# Altium PCB Sensorunit.PcbDoc
Units mil, origin at the board's own origin, x right, y up, seen from the top; angles counter-clockwise.
Board outline 2558.19 x 2342.03 mil, 2 copper layers (Top Layer, Bottom Layer); 24 components, 16 nets, 103 pads, 16 vias.
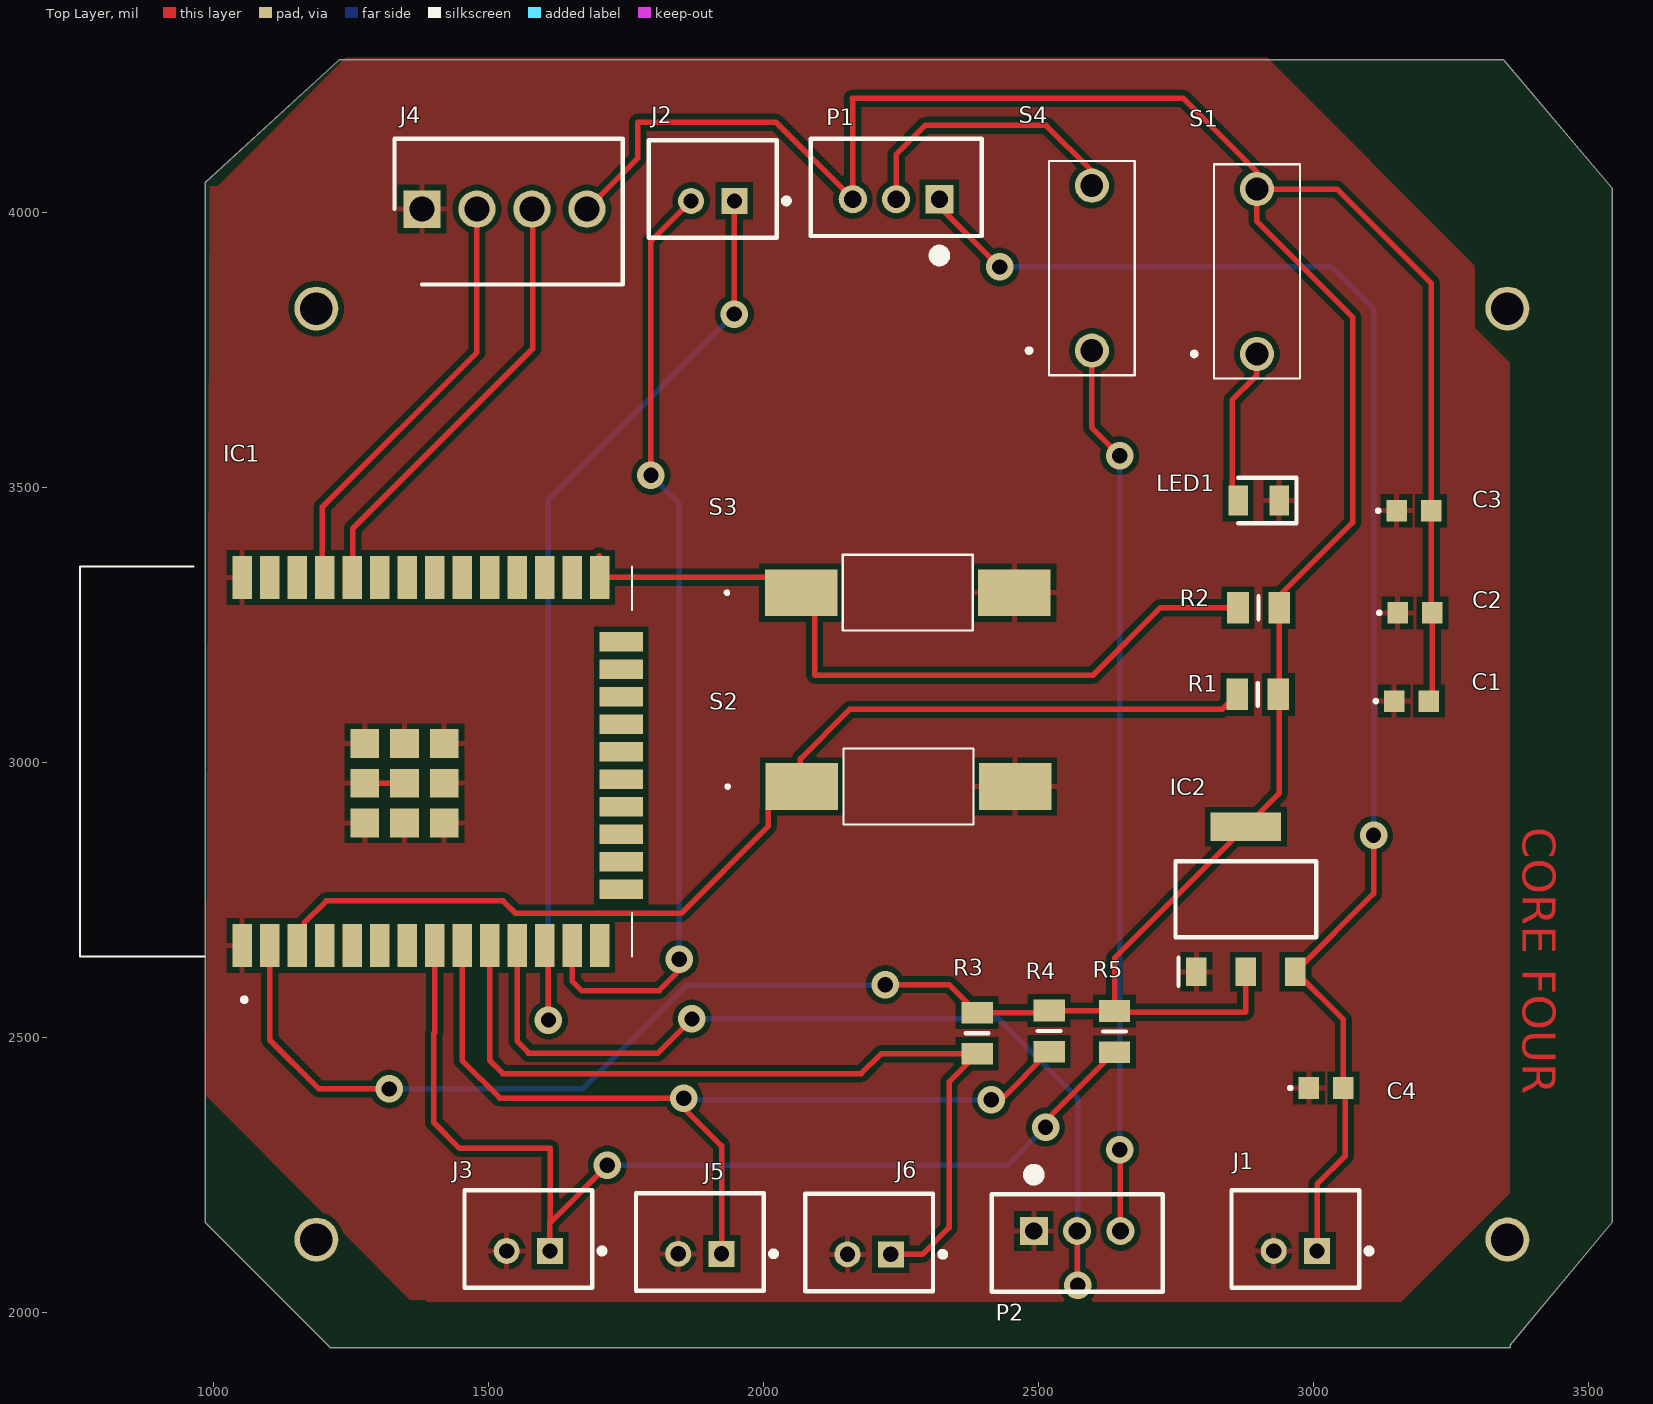
[diagram p0: Top Layer view]
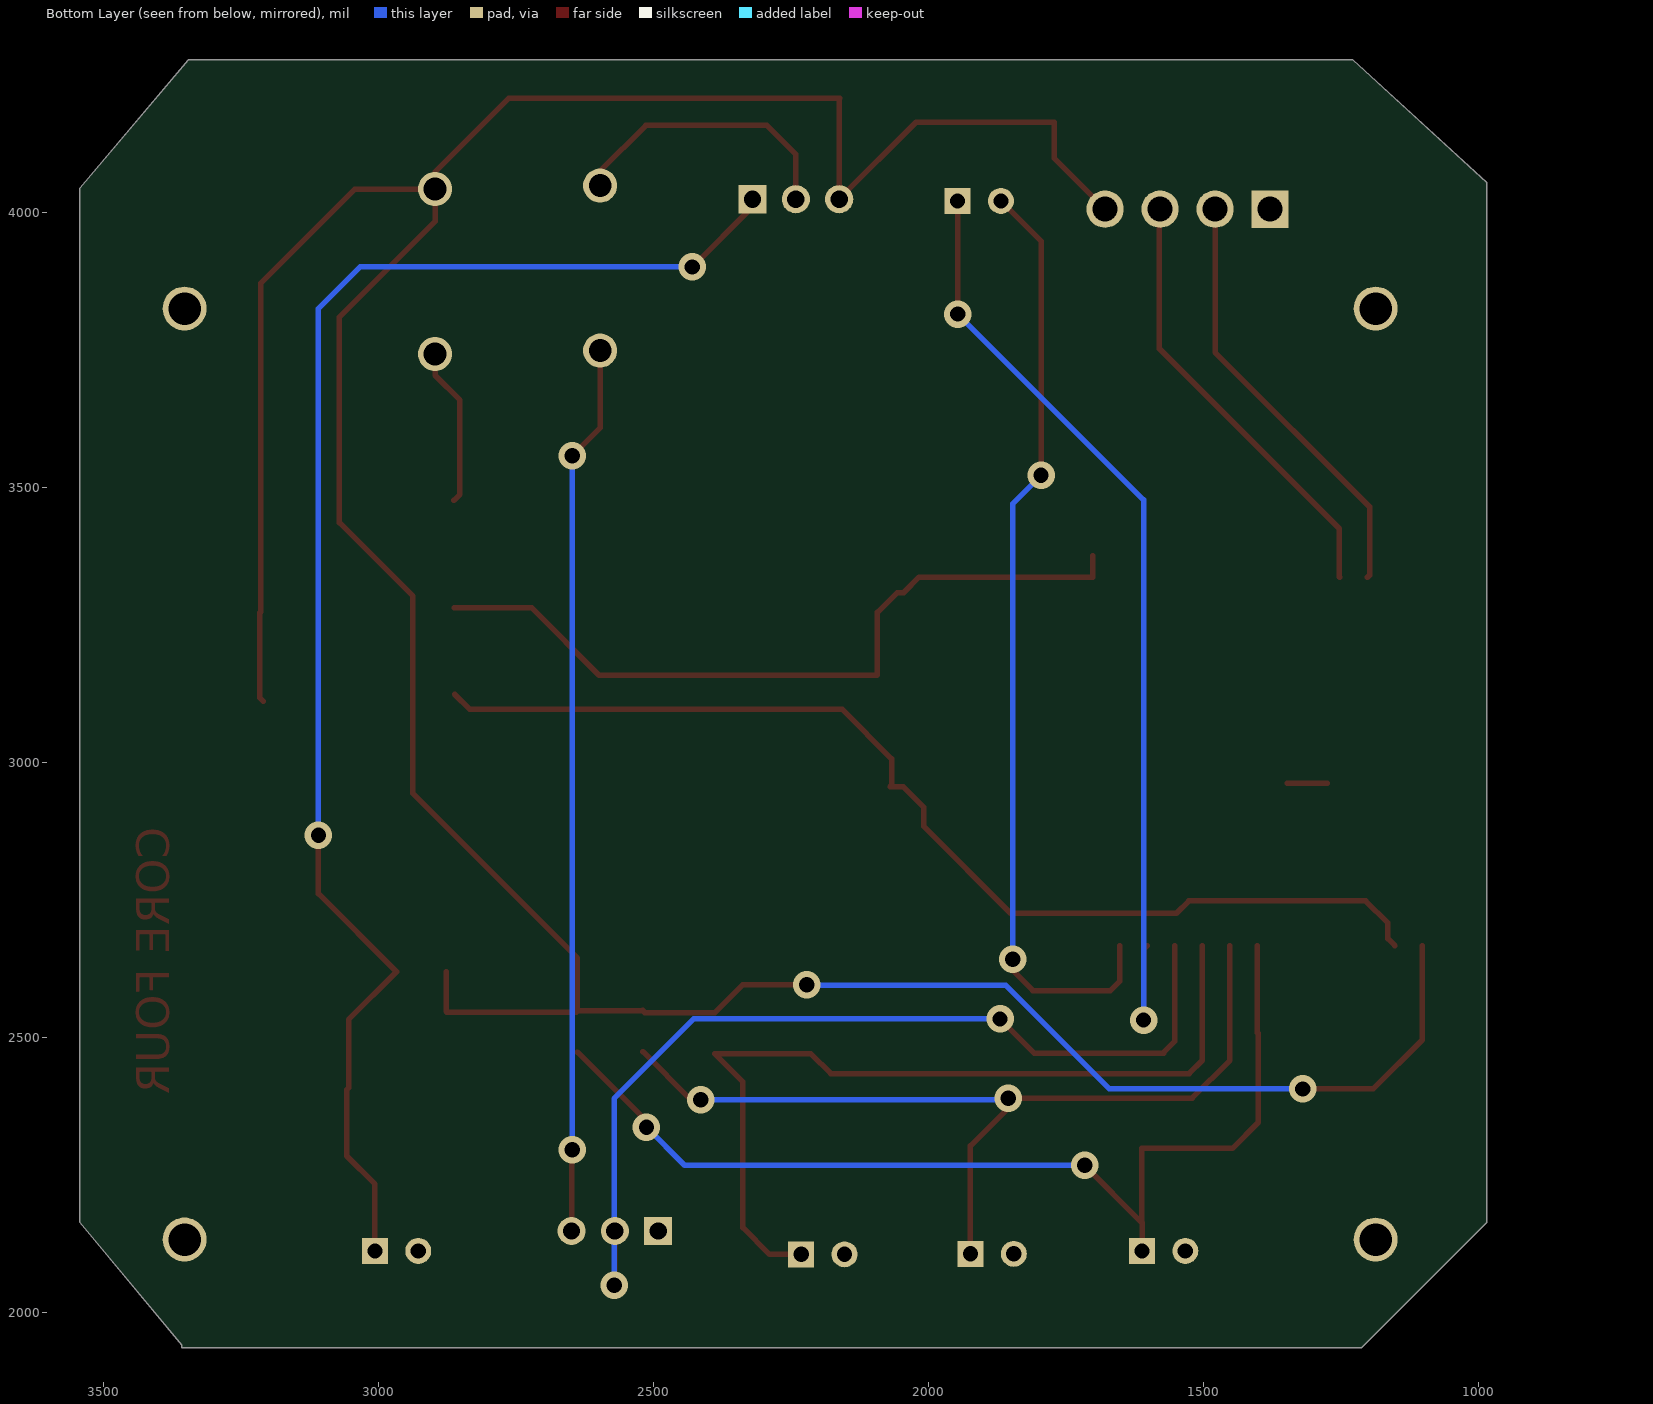
[diagram p1: Bottom Layer view, seen from below]
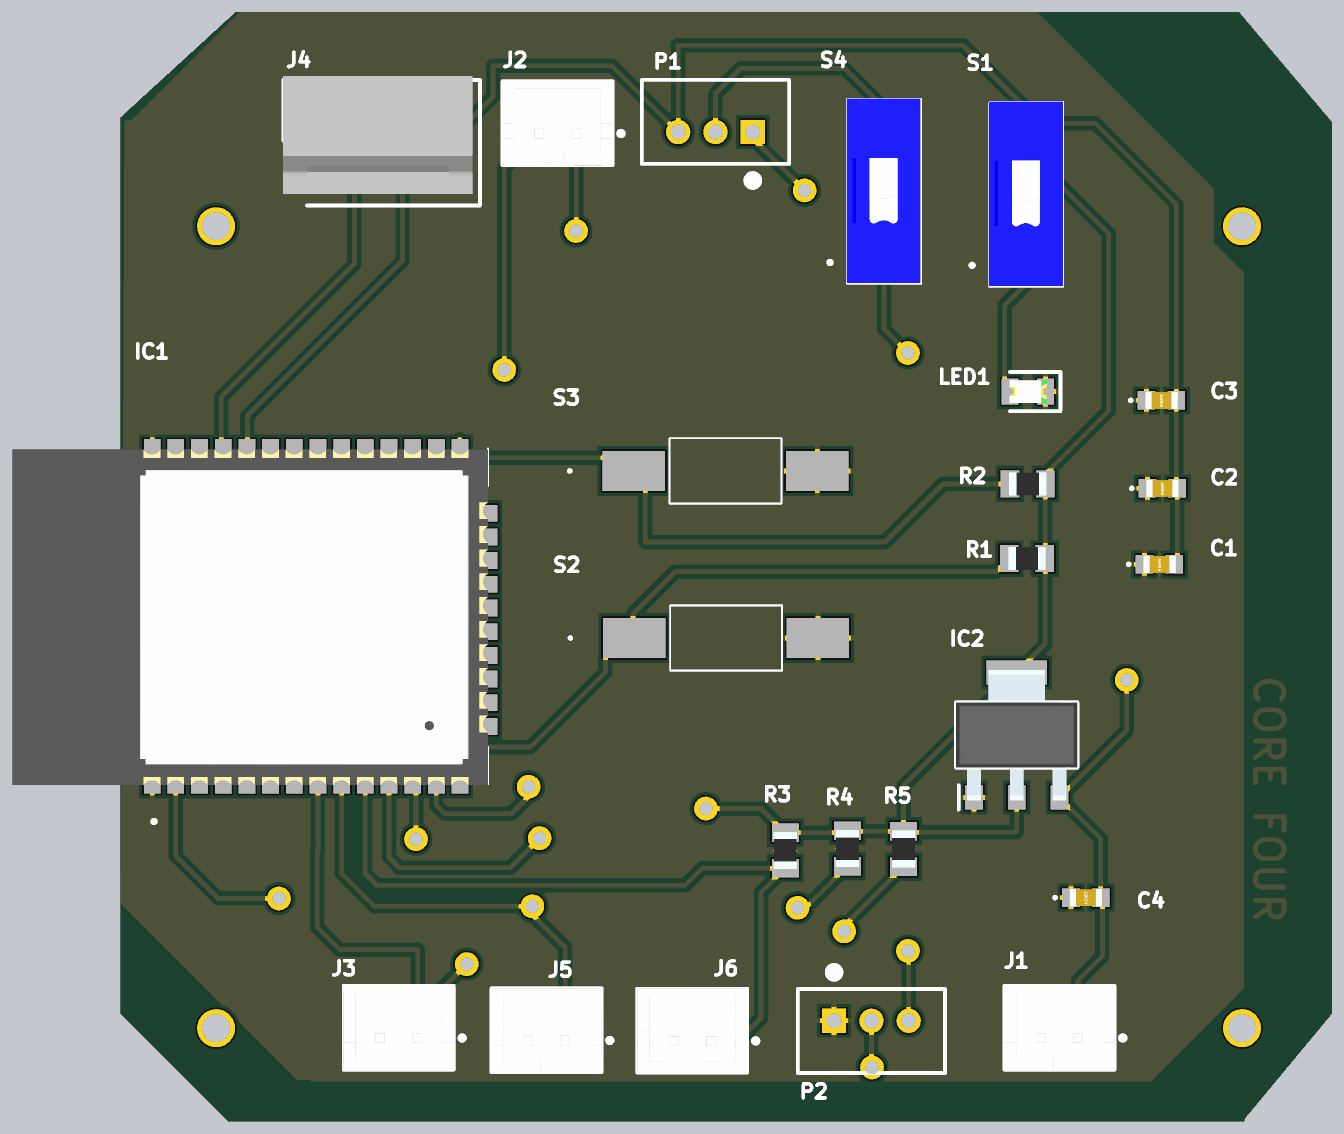
[diagram p2: 3D render of the assembled board from above, using the file's embedded part models]

## Layer stack, top to bottom
Top Solder: solder mask 0.4, Solder Resist, Dk 3.5
Top Layer: signal copper 1.4
Dielectric 1: dielectric 12.6, FR-4, Dk 4.8
Bottom Layer: signal copper 1.4
Bottom Solder: solder mask 0.4, Solder Resist, Dk 3.5

## Board outline
1228.86,4277.44 985.33,4054.64 985.33,4033.91 985.33,2163.39 1213.31,1935.41 3358.45,1935.41 3358.45,1940.59 3543.52,2163.39 3543.52,4044.27 3346.62,4277.44

## Design rules (kind name [scope] priority, off if disabled: settings)
Clearance [All] p1: gap=10 ignorepadtopadclearanceinfootprint=FALSE except(0: Arc-Hole Track-Hole SMDPad-Hole THPad-Hole Via-Hole Fill-Hole Poly-Hole Region-Hole Text-Hole)
PolygonConnect [All] p1: connectstyle=Relief reliefconductorwidth=10 reliefentries=4 polygonreliefangle="90 Angle" airgapwidth=10
RoutingVias [All] p1: holewidth=28 width=50 viastyle="Through Hole" minholewidth=28 minwidth=50 maxholewidth=28 maxwidth=50
SolderMaskExpansion [All] p1: expansion=4 istentingtop=FALSE
Width [All] p1: maxlimit=10 minlimit=10 preferedwidth=10
30 further rules are at their usual default settings.

## Components (designator, comment, footprint, x,y, rotation, side; value= is the part's Value field where it differs from the comment)
C1 "C0603C104K4RALTU" C0603 3179.01,3111.51 r0 top
C2 "C0603C104K4RALTU" C0603 3185.19,3271.96 r0 top
C3 "C0603C104K4RALTU" C0603 3183.19,3457.68 r0 top
C4 "C0603C104K4RALTU" C0603 3023.6,2407.91 r0 top
IC1 "ESP32-WROOM-32D_M113DH3200PS3Q0_" ESP32WROOM32DM113DH3200PS3Q0 1052.48,2666.97 r90 top
IC2 "ams1117-3.3v" SOT229P700X180-4N 2877.7,2751.18 r90 top
J1 "B2B-PH-K(LF)(SN)" FP-B2B-PH-K_LF_SN-MFG 2967.75,2133.23 r0 top
J2 "B2B-PH-K(LF)(SN)" FP-B2B-PH-K_LF_SN-MFG 1908.27,4042.66 r0 top
J3 "B2B-PH-K(LF)(SN)" FP-B2B-PH-K_LF_SN-MFG 1572.92,2133.23 r0 top
J4 "3-647050-4" SHDR4W66P0X254_1X4_1016X635X1079P 1379.46,4006.17 r0 top
J5 "B2B-PH-K(LF)(SN)" FP-B2B-PH-K_LF_SN-MFG 1884.82,2128.05 r0 top
J6 "B2B-PH-K(LF)(SN)" FP-B2B-PH-K_LF_SN-MFG 2192.61,2127.12 r0 top
LED1 "150080BS75000" LEDC2012X80N 2900.98,3476.25 r180 top
P1 "B3B-PH-K-S(LF)(SN)" JST-B3B-PH-K-S-3_V 2241.69,4045.77 r180 top
P2 "B3B-PH-K-S(LF)(SN)" JST-B3B-PH-K-S-3_V 2570.86,2126.19 r0 top
R1 "CPF0805B100RE1" RESC2012X65N 2899.39,3123.8 r0 top
R2 "CPF0805B100RE1" RESC2012X65N 2900.72,3281.25 r0 top
R3 "CPF0805B100RE1" RESC2012X65N 2389.1,2507.56 r90 top
R4 "CPF0805B100RE1" RESC2012X65N 2520.05,2511.46 r90 top
R5 "CPF0805B100RE1" RESC2012X65N 2638.83,2510.6 r90 top
S1 "DS01-254-S-01BE" DS01254S01BE 2897.88,3742.68 r0 top
S2 "TL3302AF180QG" TL3302AF180QG 2264.19,2956.07 r0 top
S3 "TL3302AF180QG" TL3302AF180QG 2262.87,3308.69 r0 top
S4 "DS01-254-S-01BE" DS01254S01BE 2597.64,3748.87 r0 top

## Footprints (in the part's own frame and the unit in brackets; to place one, negate y for a bottom-side part, rotate by r counter-clockwise, add the part's x,y. Pads: shape width x height; smd on the part's side, far side on the other; paste and mask are expansions set on the pad)
C0603 [mm]
  rect 0.95x1 smd: 1(-0.8,0) 2(0.8,0)
  silkscreen extent -1.7,-0.05 -1.6,0.05, body extent -0.87,-0.48 0.88,0.47, height 0.87
DS01254S01BE [mm]
  round 1.575 hole 1.05: 1(0,0) 2(0,7.62)
  silkscreen extent -3,-1.14 1.98,8.76, body extent -2,-1.1 1.95,8.8, height 6.53
ESP32WROOM32DM113DH3200PS3Q0 [mm]
  rect 2x0.9 smd: 1(0,0) 2(0,-1.27) 3(0,-2.54) 4(0,-3.81) 5(0,-5.08) 6(0,-6.35) 7(0,-7.62) 8(0,-8.89) 9(0,-10.16) 10(0,-11.43) 11(0,-12.7) 12(0,-13.97) 13(0,-15.24) 14(0,-16.51) 25(17,-16.51) 26(17,-15.24) 27(17,-13.97) 28(17,-12.7) 29(17,-11.43) 30(17,-10.16) 31(17,-8.89) 32(17,-7.62) 33(17,-6.35) 34(17,-5.08) 35(17,-3.81) 36(17,-2.54) 37(17,-1.27) 38(17,0)
  rect 0.9x2 smd: 15(2.6,-17.51) 16(3.87,-17.51) 17(5.14,-17.51) 18(6.41,-17.51) 19(7.68,-17.51) 20(8.95,-17.51) 21(10.22,-17.51) 22(11.49,-17.51) 23(12.76,-17.51) 24(14.03,-17.51)
  rect 1.33x1.33 smd: 39(5.665,-5.665) 40(7.5,-5.665) 41(9.335,-5.665) 42(5.665,-7.5) 43(7.5,-7.5) 44(9.335,-7.5) 45(5.665,-9.335) 46(7.5,-9.335) 47(9.335,-9.335)
  silkscreen extent -2.6,-18.01 17.5,7.49, body extent -0.55,-18 17.45,7.5, height 3.1
FP-B2B-PH-K_LF_SN-MFG [mm]
  rect 1.2x1.2 hole 0.7 paste-1000 mask+0: 1(1,-0.55)
  round 1.2 hole 0.7 paste-1000 mask+0: 2(-1,-0.55)
  silkscreen extent -2.95,-2.25 3.53,2.25, body extent -3.05,-2.35 3.05,2.35, height 0.25
JST-B3B-PH-K-S-3_V [mm] "Connector, 3-Leads, Body 7.9x4.5mm, Pitch 2mm"
  rect 1.3x1.3 hole 0.8: 1(-2,0.55)
  round 1.3 hole 0.8: 2(0,0.55) 3(2,0.55)
  silkscreen extent -3.95,-2.25 3.95,3.4, body extent -3.95,-2.25 3.95,2.25, height 6
LEDC2012X80N [mm]
  rect 0.9x1.4 smd: 1(-0.95,0) 2(0.95,0)
  silkscreen extent -1.75,-1.05 0.95,1.05, body extent -1.03,-0.63 0.97,0.63, height 0.7
RESC2012X65N [mm]
  rect 1x1.45 smd: 1(-0.95,0) 2(0.95,0)
  silkscreen extent 0,-0.53 0,0.53, body extent -1,-0.63 1,0.63, height 0.65
SHDR4W66P0X254_1X4_1016X635X1079P [mm]
  rect 1.725x1.725 hole 1.15: 1(0,0)
  round 1.725 hole 1.15: 2(2.54,0) 3(5.08,0) 4(7.62,0)
  silkscreen extent -1.27,-3.48 9.27,3.25, body extent -1.28,-2.88 8.88,3.47, height 10.52
SOT229P700X180-4N [mm]
  rect 1.3x0.95 smd: 1(-3.35,2.29) 2(-3.35,0) 3(-3.35,-2.29)
  rect 1.3x3.25 smd: 4(3.35,0)
  silkscreen extent -4,-3.25 1.75,3.25, body extent -3.5,-3.25 3.5,3.25, height 1.8
TL3302AF180QG [mm]
  rect 3.35x2.16 smd: 1(-4.925,0) 2(4.925,0)
  silkscreen extent -8.4,-1.75 3,1.75

## Part data
C1 C2 C3 C4: "Capacitor", Manufacturer_Name=KEMET, Mouser Part Number=80-C0603C104K4RAL, Arrow Part Number=C0603C104K4RALTU, Arrow Price/Stock=https://www.arrow.com/en/products/c0603c104k4raltu/kemet-corporation, Datasheet Link=https://content.kemet.com/datasheets/KEM_C1018_X7R_SnPb_SMD.pdf, Height=0.87mm, Manufacturer_Part_Number=C0603C104K4RALTU, Mouser Price/Stock=https://www.mouser.co.uk/ProductDetail/KEMET/C0603C104K4RALTU?qs=Av9gTi0A7zOg0Qy3fuNTKg%3D%3D
IC1: "Integrated Circuit", Manufacturer_Name="Espressif Systems", Manufacturer_Part_Number=ESP32-WROOM-32D(M113DH3200PS3Q0), Mouser Part Number=356-ESPWROOM3200PS3, Datasheet Link=https://componentsearchengine.com/Datasheets/1/ESP32-WROOM-32D(M113DH3200PS3Q0).pdf, Height=3.2mm, Mouser Price/Stock=https://www.mouser.co.uk/ProductDetail/Espressif-Systems/ESP32-WROOM-32DM113DH3200PS3Q0?qs=wnTfsH77Xs7iNQbBNob0RQ%3D%3D
IC2: "Integrated Circuit", Manufacturer_Name="Advanced Monolithic Systems", Datasheet Link=http://www.advanced-monolithic.com/pdf/ds1117.pdf, Height=1.8mm, Manufacturer_Part_Number=ams1117-3.3v
J1 J2 J3 J5 J6: library part CMP-17439-000674-1, "Connector Header Through Hole 2 position 0.079\" (2.00mm)", Color=Beige, Current Rating=2A, Insulation Resistance=1GR, Max Operating Temperature=85°C, Min Operating Temperature=-25°C, Voltage Rating=100V, Contact Material=Brass, Contact Plating=Tin, Gender=Male, Lead Free="Lead Free", Material=Polyamide, Mount="Through Hole", Number of Positions=2, Number of Rows=1, Pitch=2mm, Termination=Crimp
J4: "Connector", Manufacturer_Name="TE Connectivity", Mouser Part Number=571-3-647050-4, Arrow Part Number=3-647050-4, Arrow Price/Stock=https://www.arrow.com/en/products/3-647050-4/te-connectivity?region=nac, Datasheet Link=https://www.te.com/commerce/DocumentDelivery/DDEController?Action=showdoc&DocId=Customer+Drawing%7F647050%7FU%7Fpdf%7FEnglish%7FENG_CD_647050_U.pdf%7F3-647050-4, Height=10.79mm, Manufacturer_Part_Number=3-647050-4, Mouser Price/Stock=https://www.mouser.co.uk/ProductDetail/TE-Connectivity-AMP/3-647050-4?qs=W5ux9j661SoBsMK9vpa9%252BQ%3D%3D
LED1: "LED", Manufacturer_Name="Wurth Elektronik", Mouser Part Number=710-150080BS75000, Datasheet Link=https://katalog.we-online.com/led/datasheet/150080BS75000.pdf, Height=0.8mm, Manufacturer_Part_Number=150080BS75000, Mouser Price/Stock=https://www.mouser.co.uk/ProductDetail/Wurth-Elektronik/150080BS75000?qs=2kOmHSv6VfT2tBo3UPVqAQ%3D%3D
P1 P2: library part CMP-2000-05164-1, "Male Header, Pitch 2 mm, 1 x 3 Position, Height 6 mm, Tail Length 3.4 mm, -25 to 85 degC, RoHS, Bulk", Manufacturer=JST, Datasheet URL=https://datasheet.ciiva.com/11746/0900766b80826550-11746939.pdf, Datasheet Version=Oct-06, Manufacturer URL=http://www.jst.com/home2.html, No of Positions=3, Pitch=2mm, Style/Orientation=StraightHeader/Plug, Termination=Crimp, Type=ShroudedHeader
R1 R2 R3 R4 R5: "Resistor", Manufacturer_Name="TE Connectivity", Mouser Part Number=279-CPF0805B100RE1, Arrow Part Number=CPF0805B100RE1, Arrow Price/Stock=https://www.arrow.com/en/products/cpf0805b100re1/te-connectivity?region=nac, Datasheet Link=http://docs-europe.electrocomponents.com/webdocs/13d1/0900766b813d116f.pdf, Height=0.65mm, Manufacturer_Part_Number=CPF0805B100RE1, Mouser Price/Stock=https://www.mouser.co.uk/ProductDetail/TE-Connectivity-Holsworthy/CPF0805B100RE1?qs=9ylKvqdyudkCWLPT1QvLZQ%3D%3D
S1 S4: "Switch", Manufacturer_Name="CUI Devices", Mouser Part Number=490-DS01-254-S-01BE, Arrow Part Number=DS01-254-S-01BE, Arrow Price/Stock=https://www.arrow.com/en/products/ds01-254-s-01be/cui-devices?region=nac, Datasheet Link=https://www.mouser.in/datasheet/2/670/ds01_254-1777712.pdf, Height=7mm, Manufacturer_Part_Number=DS01-254-S-01BE, Mouser Price/Stock=https://www.mouser.co.uk/ProductDetail/CUI-Devices/DS01-254-S-01BE?qs=wnTfsH77Xs7pnks1JfJqEQ%3D%3D
S2 S3: "Switch", Manufacturer_Name=E-Switch, Mouser Part Number=612-TL3302A, Datasheet Link=https://componentsearchengine.com/Datasheets/2/TL3302AF180QG.pdf, Height=5mm, Manufacturer_Part_Number=TL3302AF180QG, Mouser Price/Stock=https://www.mouser.co.uk/ProductDetail/E-Switch/TL3302AF180QG?qs=HKd%2Fp3M7KlXmC8e3lU%2FDFQ%3D%3D

## Free pads (board coordinates)
  round 80 hole 59.06: 5(3353.27,3825.21) 7(1187.4,3825.21) 8(1187.4,2132.3) 9(3353.27,2132.3)

## Via types
v1: diameter 50, hole 28, Top Layer to Bottom Layer, 16 vias

## Nets (pads, with @x,y where several pads share a name; then routed paths per layer and width w, separated by ;. In a path a pad name is that pad's centre, name@x,y a point inside that pad or via, vN(x,y) a via of type N, cw(c..) or ccw(c..) an arc to the next point about the centre after c; other vN are vias at no path point)
3V3: C1.2 C2.2 C3.2 IC1.2 IC2.2 IC2.4 J4.4 P1.3 R1.2 R2.2 R3.2 R4.2 R5.2 S1.2 | length 6708.4
  Top Layer w10: IC1.2 1102.48,2495.66 1192.04,2406.09 v1(1320.14,2406.09) ; J4.4 1772.07,4098.77 1772.07,4164.25 2022.82,4164.25 P1.3 2162.95,4206.27 2161.58,4207.63 2764.1,4207.63 2897.88,4073.86 S1.2 ; v1(2221.65,2595.97) 2338.09,2595.97 R3.2 2516.15,2544.96 R4.2 2520.91,2548 R5.2 ; IC2.2 2877.7,2547.02 2876.58,2545.9 2640.93,2545.9 R5.2 ; C1.2 3216.69,3117.69 C2.2 3214.68,3273.97 C3.2 3214.68,3871.45 3043.45,4042.68 S1.2 ; R5.2 2638.83,2644.2 IC2.4 2938.12,2943.49 R2.2 2938.12,3302.24 3071.78,3435.9 3071.78,3809.7 2897.88,3983.6 S1.2
  Bottom Layer w10: v1(1320.14,2406.09) 1671.47,2406.09 1859.85,2594.47 2220.15,2594.47 v1(2221.65,2595.97)
14: IC1.13 J2.2 | length 1732.5
  Top Layer w10: IC1.13 1652.48,2602.46 1670,2584.94 1810.54,2584.94 1847.14,2621.54 v1(1847.14,2642.04) ; v1(1795.9,3521.89) 1795.9,3948.02 J2.2
  Bottom Layer w10: v1(1795.9,3521.89) 1847.14,3470.65 v1(1847.14,2642.04)
25: IC1.10 J6.1 R3.1 | length 1583.7
  Top Layer w10: IC1.10 1502.48,2458.36 1526.8,2434.04 2178.09,2434.04 2214.21,2470.16 R3.1 2337.91,2418.97 2337.91,2153.94 2289.44,2105.47 J6.1
26: IC1.11 P2.2 | length 1733.9
  Top Layer w10: IC1.11 1552.48,2493.2 1573.08,2472.61 1573.08,2470.89 1807.88,2470.89 v1(1870.44,2533.45) ; v1(2572.3,2049.26) 2570.86,2050.7 P2.2 P2.2@2574.87,2143.84
  Bottom Layer w10: v1(1870.44,2533.45) 2427.47,2533.45 2572.3,2388.62 v1(2572.3,2049.26)
27: IC1.12 J2.1 | length 1768
  Top Layer w10: IC1.12 1609.55,2659.9 v1(1609.55,2531.48) ; v1(1947.41,3815.36) 1947.64,3815.58 J2.1
  Bottom Layer w10: v1(1609.55,2531.48) 1609.55,3477.49 v1(1947.41,3815.36)
32: IC1.8 J3.1 R5.1 | length 1901.3
  Top Layer w10: IC1.8 1402.48,2508.6 1400.91,2507.03 1400.91,2345.25 1447.97,2298.19 1612.89,2298.19 1612.89,2163.66 ; J3.1 1612.29,2163.06 1612.89,2163.66 ; v1(1716.68,2267.46) 1612.89,2163.66 ; v1(2513.39,2336.74) 2513.39,2347.76 R5.1
  Bottom Layer w10: v1(1716.68,2267.46) 2444.11,2267.46 v1(2513.39,2336.74)
33: IC1.9 J5.1 R4.1 | length 1654.2
  Top Layer w10: IC1.9 1452.48,2458.24 1521.12,2389.59 v1(1855.17,2389.59) 1855.17,2371.75 1924.3,2302.62 1924.3,2106.5 J5.1 ; v1(2415.01,2386.44) 2432.44,2386.44 R4.1
  Bottom Layer w10: v1(1855.17,2389.59) 1858.33,2386.44 v1(2415.01,2386.44)
EN: IC1.3 R1.1 S2.1 | length 1987.8
  Top Layer w10: IC1.3 1165.2,2679.69 1165.2,2707.99 1205.51,2748.3 1527.15,2748.3 1549.8,2725.65 1851,2725.65 2009.35,2884 2009.35,2918.55 2046.87,2956.07 S2.1 2067.51,2958.85 2067.51,3006.48 2157.22,3096.19 2834.38,3096.19 R1.1
GND: C1.1 C2.1 C3.1 C4.1 IC1.1 IC1.38 IC1.39 IC1.40 IC1.41 IC1.42 IC1.43 IC1.44 IC1.45 IC1.46 IC1.47 IC2.1 J1.2 J3.2 J4.1 J5.2 J6.2 LED1.1 P2.1 S2.2 S3.2 | length 72.2
  Top Layer w10: IC1.40 IC1.43
GPIO0: IC1.25 R2.1 S3.1 | length 1392.3
  Top Layer w10: 1701.56,3375.85 1701.56,3337.18 IC1.25 ; IC1.25@1702.02,3336.72 2017.52,3336.72 2045.55,3308.69 2057.26,3308.69 2093.33,3272.63 2093.33,3159.4 2094.25,3158.48 2599.36,3158.48 2722.12,3281.25 R2.1
NetC4_2: C4.2 IC2.3 J1.1 P1.1 | length 2711.4
  Top Layer w10: P1.1 2320.43,4010.39 v1(2429.93,3900.89) ; J1.1 3007.12,2233.09 3058.72,2284.68 3058.72,2404.29 C4.2 3055.09,2532.05 IC2.3 3109.83,2761.26 v1(3109.83,2867.31)
  Bottom Layer w10: v1(2429.93,3900.89) 3034.28,3900.89 3109.83,3825.35 v1(3109.83,2867.31)
NetLED1_2: LED1.2 S1.1 | length 289.7
  Top Layer w10: LED1.2 2852.62,3487.2 2852.62,3658.71 2897.88,3703.98 S1.1
NetP2_3: P2.3 S4.1 | length 1622.5
  Top Layer w10: S4.1 2597.64,3608.13 v1(2648.04,3557.73) ; v1(2648.04,2295.46) 2649.6,2293.9 P2.3
  Bottom Layer w10: v1(2648.04,2295.46) v1(2648.04,3557.73)
PIR: P1.2 S4.2 | length 520
  Top Layer w10: P1.2 2241.69,4105.46 2294.63,4158.4 2514.42,4158.4 2597.64,4075.18 S4.2
RX: IC1.34 J4.3 | length 825.7
  Top Layer w10: IC1.34 1253.59,3337.37 1253.59,3425.05 1580.95,3752.41 J4.3@1580.95,4025.92
TX: IC1.35 J4.2 | length 788.2
  Top Layer w10: IC1.35 1198.15,3340.59 1198.15,3464.45 1479.46,3745.77 J4.2
pads on no net: IC1.4 IC1.5 IC1.6 IC1.7 IC1.14 IC1.15 IC1.16 IC1.17 IC1.18 IC1.19 IC1.20 IC1.21 IC1.22 IC1.23 IC1.24 IC1.26 IC1.27 IC1.28 IC1.29 IC1.30 IC1.31 IC1.32 IC1.33 IC1.36 IC1.37

## Polygon pours and split planes (outlines as drawn)
GND on Top Layer "GND_L01_P000" (solid, remove dead copper, pour order 0): 993.96,4051.61 993.96,4048.08 1008.08,4048.08 1240.93,4280.94 2916.8,4280.94 3294.32,3903.42 3294.32,3790.52 3357.82,3727.02 3357.82,2216.97 3160.25,2019.39 1389.12,2019.39 1385.59,2022.92 1357.36,2022.92 986.91,2393.38

## Other copper
Top Layer:
  text "CORE FOUR" at 3381.3,2882.46 h60 r270